# Altium PCB Rover_Science_Card_V1.PcbDoc
Units mm, origin at the board's own origin, x right, y up, seen from the top; angles counter-clockwise.
Board outline 99 x 101.8 mm, 2 copper layers (Top Layer, Bottom Layer); 10 components, 19 nets, 83 pads, 1 vias.
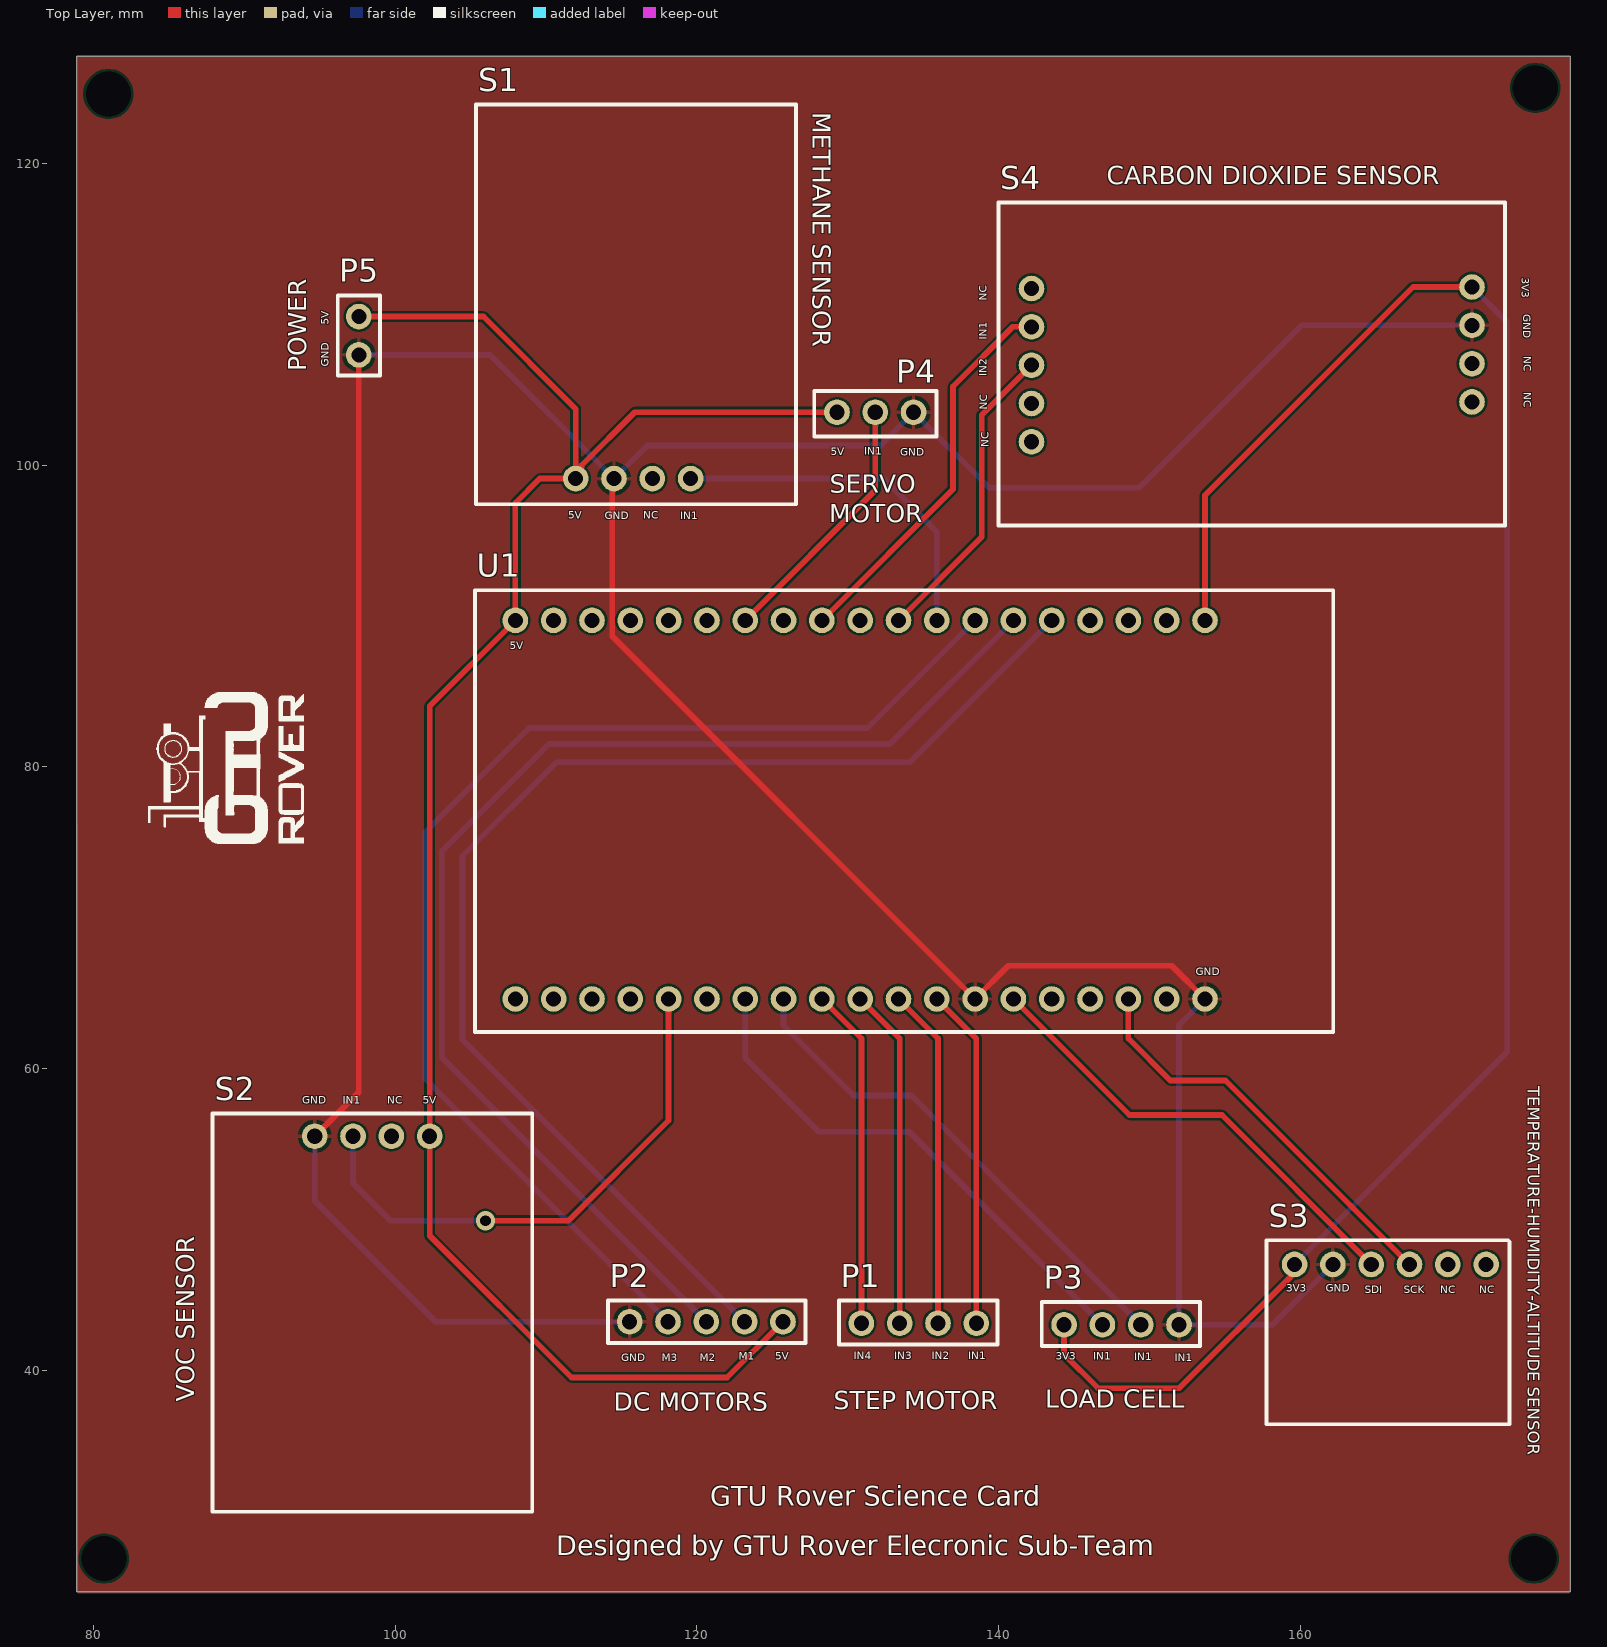
[diagram p0: Top Layer view]
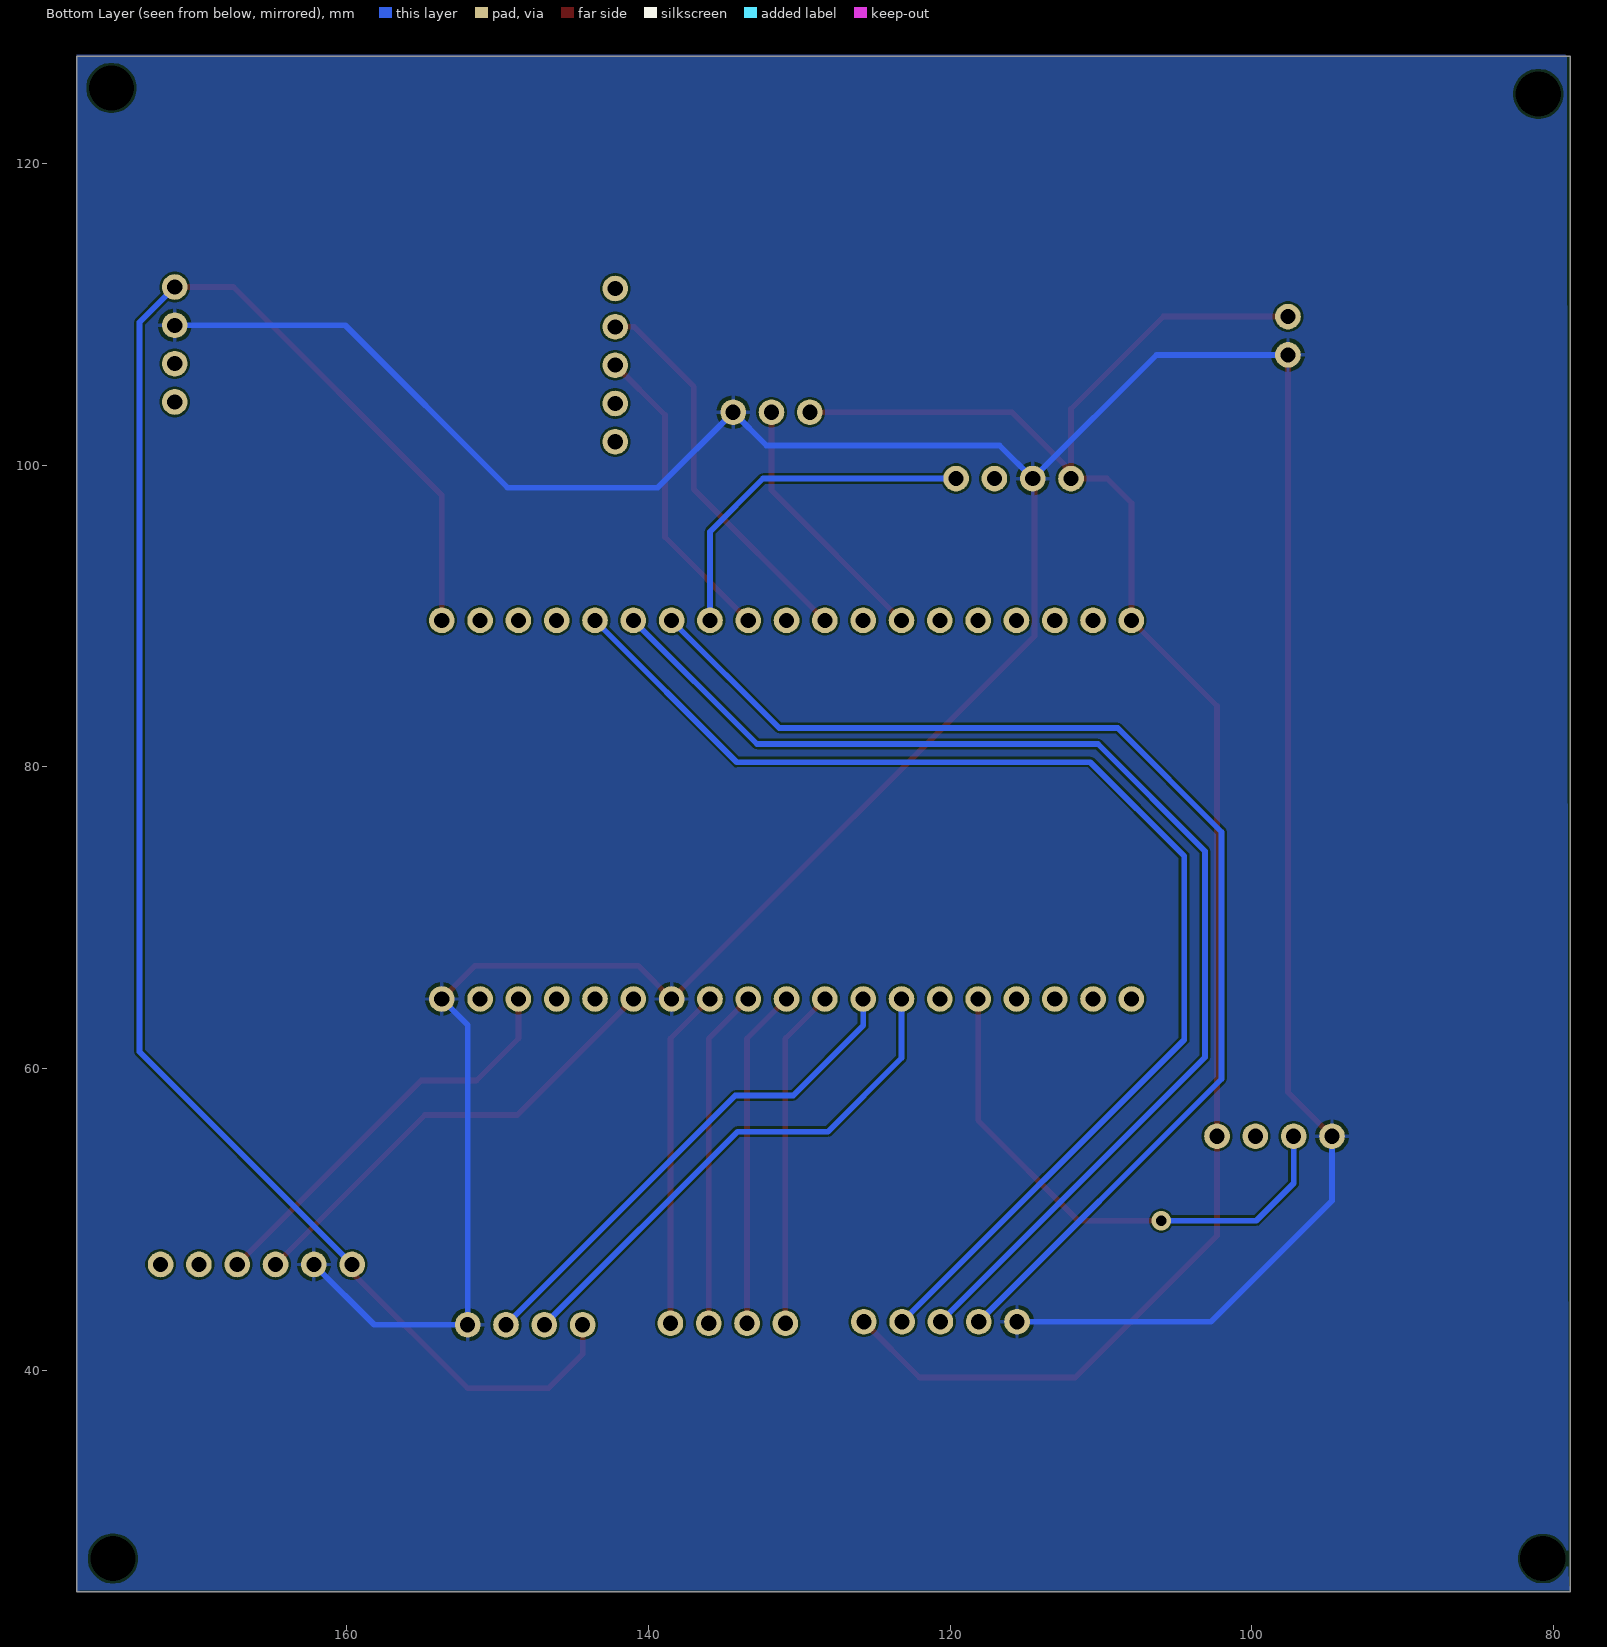
[diagram p1: Bottom Layer view, seen from below]

## Layer stack, top to bottom
Top Solder: solder mask 0.0102, Solder Resist, Dk 3.5
Top Layer: signal copper 0.0356
Dielectric 1: dielectric 0.32, FR-4, Dk 4.8
Bottom Layer: signal copper 0.0356
Bottom Solder: solder mask 0.0102, Solder Resist, Dk 3.5

## Board outline
78.9,25.3 78.9,127.1 177.9,127.1 177.9,25.3

## Design rules (kind name [scope] priority, off if disabled: settings)
Clearance [All] p1: gap=0.254 ignorepadtopadclearanceinfootprint=FALSE except(0: Arc-Hole Track-Hole SMDPad-Hole THPad-Hole Via-Hole Fill-Hole Poly-Hole Region-Hole Text-Hole; 0.152: Arc-Track Arc-SMDPad Arc-THPad Arc-Poly Track-Track Track-SMDPad Track-THPad Track-Poly SMDPad-SMDPad SMDPad-THPad SMDPad-Poly THPad-THPad THPad-Poly Via-Poly Fill-Poly Poly-Poly)
Height [All] p1: minheight=0 maxheight=50 prefheight=12.7
PolygonConnect [All] p1: connectstyle=Relief reliefconductorwidth=0.254 reliefentries=4 polygonreliefangle="90 Angle" airgapwidth=0.254
RoutingVias [All] p1: holewidth=0.711 width=1.27 viastyle="Through Hole" minholewidth=0.711 minwidth=1.27 maxholewidth=0.711 maxwidth=1.27
SolderMaskExpansion [All] p1: expansion=0.102 istentingtop=FALSE
Width [All] p1: maxlimit=1 minlimit=0.254 preferedwidth=0.3 minimp=50.000000 maximp=50.000000 favimp=50.000000
29 further rules are at their usual default settings.

## Components (designator, comment, footprint, x,y, rotation, side; value= is the part's Value field where it differs from the comment)
P1 "STEP_MOTOR_PIN" HX711 138.54,43.1 r270 top
P2 "MOTOR_PIN" Motor_PIN 120.72,43.2 r270 top
P3 "HX711" HX711 151.98,43 r270 top
P4 "SERVO_PIN" "Servo PIN" 131.9,103.5 r90 top
P5 "POWER_PIN" POWER 97.6,109.04 r0 top
S1 "MQ4" MQ4 115.58,111.4 r90 top
S2 "MQ135" MQ135 98.5,44.2 r270 top
S3 "BME280" BME280 164.68,47 r90 top
S4 "MHZ19" MHZ19 156.5,106.1 r0 top
U1 "ESP32-WROOM32-32U" ESP32-WROOM-32U 133.5,76.3 r270 top

## Footprints (in the part's own frame and the unit in brackets; to place one, negate y for a bottom-side part, rotate by r counter-clockwise, add the part's x,y. Pads: shape width x height; smd on the part's side, far side on the other; paste and mask are expansions set on the pad)
BME280 [mm] "Temperature-Humidity-Altidute"
  round 1.7 hole 1: 1(0,5.04) 2(0,2.5) 3(0,-0.04) 4(0,-2.58) 5(0,-5.12) 6(0,-7.66)
  silkscreen extent -10.6,-9.2 1.6,6.9, body extent -10.25,-8.9 1.25,6.44, height 6.3
ESP32-WROOM-32U [mm] "Microcontroller"
  round 1.7 hole 1: 1(-13.4,20.2) 2(-13.4,17.66) 3(-13.4,15.12) 4(-13.4,12.58) 5(-13.4,10.04) 6(-13.4,7.5) 7(-13.4,4.96) 8(-13.4,2.42) 9(-13.4,-0.12) 10(-13.4,-2.66) 11(-13.4,-5.2) 12(-13.4,-7.74) 13(-13.4,-10.28) 14(-13.4,-12.82) 15(-13.4,-15.36) 16(-13.4,-17.9) 17(-13.4,-20.44) 18(-13.4,-22.98) 19(-13.4,-25.52) 20(11.7,20.2) 21(11.7,17.66) 22(11.7,15.12) 23(11.7,12.58) 24(11.7,10.04) 25(11.7,7.5) 26(11.7,4.96) 27(11.7,2.42) 28(11.7,-0.12) 29(11.7,-2.66) 30(11.7,-5.2) 31(11.7,-7.74) 32(11.7,-10.28) 33(11.7,-12.82) 34(11.7,-15.36) 35(11.7,-17.9) 36(11.7,-20.44) 37(11.7,-22.98) 38(11.7,-25.52)
  silkscreen extent -15.4,-28.2 13.9,28.7, body extent -14.77,-27.5 13.17,27.6, height 6.69
HX711 [mm] "Load Cell Censor"
  round 1.7 hole 1: 1(0,0) 2(0,-2.54) 3(0,-5.08) 4(0,-7.62)
  silkscreen extent -1.5,-9.1 1.4,1.4, body extent -1.29,-8.88 1.2,1.28, height 8.54
MHZ19 [mm] "CO2 Sensor"
  round 1.7 hole 1: 1(14.9,5.7) 2(14.9,3.16) 3(14.9,0.62) 4(14.9,-1.92) 5(-14.3,5.6) 6(-14.3,3.06) 7(-14.3,0.52) 8(-14.3,-2.02) 9(-14.3,-4.56)
  silkscreen extent -16.5,-10.1 17.1,11.3, body extent -15.87,-9.2 16.7,10.55, height 9
Motor_PIN [mm]
  round 1.7 hole 1: 1(0,5) 2(0,2.46) 3(0,-0.08) 4(0,-2.62) 5(0,-5.16)
  silkscreen extent -1.4,-6.6 1.4,6.5, body extent -1.24,-6.43 1.24,6.27, height 8.54
MQ4 [mm] "CH4 Sensor"
  round 1.7 hole 1: 1(-12.3,3.6) 2(-12.3,1.06) 3(-12.3,-1.48) 4(-12.3,-4.02)
  silkscreen extent -14,-11 12.5,10.2, body extent -13.4,-10.3 12.1,9.7, height 33
MQ135 [mm]
  round 1.7 hole 1: 1(-11.3,3.8) 2(-11.3,1.26) 3(-11.3,-1.28) 4(-11.3,-3.82)
  silkscreen extent -12.8,-10.6 13.6,10.6, body extent -12.3,-10 13.2,10, height 33
POWER [mm] "5V-GND"
  round 1.7 hole 1: 1(0,0.8) 2(0,-1.74)
  silkscreen extent -1.4,-3.1 1.4,2.2, body extent -1.25,-3.01 1.24,2.07, height 8.54
"Servo PIN" [mm]
  round 1.7 hole 1: 1(0,2.6) 2(0,0.06) 3(0,-2.48)
  silkscreen extent -1.6,-4 1.4,4.1, body extent -1.3,-3.87 1.24,3.87, height 15.75

## Free pads (board coordinates)
  round 0 hole 3: 2(175.5,27.5) 3(80.7,27.5) 4(81,124.6) 5(175.6,125)

## Via types
v1: diameter 1.27, hole 0.711, Top Layer to Bottom Layer, 1 vias

## Nets (pads, with @x,y where several pads share a name; then routed paths per layer and width w, separated by ;. In a path a pad name is that pad's centre, name@x,y a point inside that pad or via, vN(x,y) a via of type N, cw(c..) or ccw(c..) an arc to the next point about the centre after c; other vN are vias at no path point)
3V3: P3.4 S3.1 S4.1 U1.1 | length 125.3
  Top Layer w0.381: P3.4 144.36,41.04 146.6,38.8 152,38.8 159.388,46.188 159.388,46.391 159.437,46.44 159.64,46.44 S3.1 ; U1.1 153.7,98 167.5,111.8 S4.1
  Bottom Layer w0.381: S3.1 173.74,61.1 173.74,109.46 S4.1
5V: P2.1 P4.1 P5.1 S1.1 S2.1 U1.19 | length 125
  Top Layer w0.381: P5.1 105.86,109.84 111.98,103.72 S1.1@111.98,99.58 ; P2.1 122.02,39.5 111.7,39.5 102.3,48.9 S2.1 102.3,84.02 U1.19 107.98,97.48 109.6,99.1 S1.1 S1.1@111.98,99.58 ; P4.1 115.9,103.5 112.364,99.964 112.364,99.841 112.103,99.58 S1.1@111.98,99.58
GND: P2.5 P3.1 P4.3 P5.2 S1.2 S2.4 S3.2 S4.2 U1.20 U1.26 | length 262.8
  Top Layer w0.381: S2.4 97.6,58.42 P5.2 ; S1.2 114.407,98.987 114.407,88.653 U1.26 140.66,66.8 151.5,66.8 U1.20
  Bottom Layer w0.381: S2.4 94.68,51.22 102.7,43.2 P2.5 ; P5.2 106.32,107.3 S1.2 116.72,101.3 132.18,101.3 P4.3 139.38,98.5 149.342,98.5 160.102,109.26 S4.2 ; U1.20 151.98,62.88 P3.1 158.18,43 S3.2
NetP1_1: P1.1 U1.27 | length 22.6
  Top Layer w0.381: U1.27 138.54,61.98 P1.1
NetP1_2: P1.2 U1.28 | length 22.6
  Top Layer w0.381: U1.28 136,61.98 P1.2
NetP1_3: P1.3 U1.29 | length 22.6
  Top Layer w0.381: U1.29 133.46,61.98 P1.3
NetP1_4: P1.4 U1.30 | length 22.6
  Top Layer w0.381: U1.30 130.92,61.98 P1.4
NetP2_2: P2.2 U1.5 | length 84.2
  Bottom Layer w0.381: P2.2 104.48,61.9 104.48,74.08 110.7,80.3 134.14,80.3 U1.5
NetP2_3: P2.3 U1.6 | length 82.7
  Bottom Layer w0.381: P2.3 103.1,60.74 103.1,74.4 110.2,81.5 132.8,81.5 U1.6
NetP2_4: P2.4 U1.7 | length 81.4
  Bottom Layer w0.381: P2.4 102,59.3 102,75.677 108.885,82.562 131.322,82.562 U1.7
NetP3_2: P3.2 U1.31 | length 33.7
  Bottom Layer w0.381: U1.31 125.76,62.84 130.4,58.2 134.24,58.2 P3.2
NetP3_3: P3.3 U1.32 | length 34.9
  Bottom Layer w0.381: U1.32 123.22,60.68 128.1,55.8 134.1,55.8 P3.3
NetP4_2: P4.2 U1.13 | length 17.4
  Top Layer w0.381: U1.13 131.84,98.32 P4.2
NetS1_4: S1.4 U1.8 | length 23.7
  Bottom Layer w0.381: S1.4 132.4,99.1 135.92,95.58 U1.8
NetS2_3: S2.3 U1.34 | length 35.9
  Top Layer w0.381: v1(106,49.9) 111.5,49.9 118.14,56.54 U1.34
  Bottom Layer w0.381: S2.3 97.22,52.38 99.7,49.9 v1(106,49.9)
NetS3_3: S3.3 U1.25 | length 31
  Top Layer w0.381: U1.25 148.7,56.9 154.82,56.9 S3.3
NetS3_4: S3.4 U1.22 | length 27.5
  Top Layer w0.381: U1.22 148.62,61.98 151.4,59.2 155.06,59.2 S3.4
NetS4_6: S4.6 U1.11 | length 25.9
  Top Layer w0.381: U1.11 137,98.4 137,105.2 140.96,109.16 S4.6
NetS4_7: S4.7 U1.9 | length 20.6
  Top Layer w0.381: U1.9 138.9,95.22 138.9,103.32 S4.7
pads on no net: S1.3 S2.2 S3.5 S3.6 S4.3 S4.4 S4.5 S4.8 S4.9 U1.2 U1.3 U1.4 U1.10 U1.12 U1.14 U1.15 U1.16 U1.17 U1.18 U1.21 U1.23 U1.24 U1.33 U1.35 U1.36 U1.37 U1.38

## Polygon pours and split planes (outlines as drawn)
GND on Top Layer "GND_L01_P000" (solid, pour order 0): 79,127.1 177.8,127.1 177.8,25.4 178,25.2 78.9,25.2
GND on Bottom Layer "GND_L02_P001" (solid, pour order 1): 79.1,127.1 79.2,127.2 177.9,127.2 177.9,25.2 177.7,25.4 78.9,25.4 78.9,25.6 79,25.7

## Silkscreen, mask and mechanical layers (free items; w line width, h text height)
Top Overlay:
  drawing of 7 lines, arcs and shapes, not listed
  text "METHANE SENSOR" at 127.7,123.4 h1.2 r270
  text "CARBON DIOXIDE SENSOR" at 147.2,118.6 h1.2
  text "3V3" at 174.7,112.4 h0.5 r270
  text "NC" at 139.223,110.893 h0.5 r90
  text "GND" at 174.8,110 h0.5 r270
  text "5V" at 95.623,109.293 h0.5 r90
  text "IN1" at 139.223,108.293 h0.5 r90
  text "NC" at 174.834,107.227 h0.5 r270
  text "GND" at 95.6,106.5 h0.5 r90
  text "POWER" at 94.1,106.2 h1.2 r90
  text "IN2" at 139.223,105.893 h0.5 r90
  text "NC" at 174.834,104.827 h0.5 r270
  text "NC" at 139.266,103.673 h0.5 r90
  text "NC" at 139.366,101.173 h0.5 r90
  text "IN1" at 131.093,100.677 h0.5
  text "5V" at 128.901,100.637 h0.5
  text "GND" at 133.5,100.6 h0.5
  text "SERVO" at 128.83,98.176 h1.2
  text "5V" at 111.501,96.437 h0.5
  text "NC" at 116.473,96.434 h0.5
  text "IN1" at 118.926,96.407 h0.5
  text "GND" at 113.9,96.4 h0.5
  text "MOTOR" at 128.8,96.2 h1.2
  text "5V" at 107.593,87.777 h0.5
  text "GND" at 153.093,66.177 h0.5
  text "TEMPERATURE-HUMIDITY-ALTITUDE SENSOR" at 175.1,58.8 h0.8 r270
  text "IN1" at 96.54,57.651 h0.5
  text "NC" at 99.485,57.669 h0.5
  text "5V" at 101.849,57.651 h0.5
  text "GND" at 93.843,57.638 h0.5
  text "3V3" at 159.093,45.177 h0.5
  text "GND" at 161.693,45.177 h0.5
  text "SDI" at 164.293,45.077 h0.5
  text "SCK" at 166.893,45.077 h0.5
  text "NC" at 169.293,45.077 h0.5
  text "NC" at 171.893,45.077 h0.5
  text "IN4" at 130.4,40.7 h0.5
  text "IN3" at 133.1,40.7 h0.5
  text "IN2" at 135.6,40.7 h0.5
  text "IN1" at 138,40.7 h0.5
  text "M1" at 122.793,40.677 h0.5
  text "5V" at 125.193,40.677 h0.5
  text "3V3" at 143.793,40.677 h0.5
  text "IN1" at 146.293,40.677 h0.5
  text "IN1" at 149.01,40.64 h0.5
  text "GND" at 114.993,40.577 h0.5
  text "M3" at 117.693,40.577 h0.5
  text "M2" at 120.193,40.577 h0.5
  text "IN1" at 151.693,40.577 h0.5
  text "VOC SENSOR" at 86.7,37.9 h1.2 r90
  text "LOAD CELL" at 143.1,37.5 h1.2
  text "STEP MOTOR" at 129.1,37.4 h1.2
  text "DC MOTORS" at 114.5,37.3 h1.2
  text "GTU Rover Science Card" at 120.9,31 h1.3
  text "Designed by GTU Rover Elecronic Sub-Team" at 110.7,27.733 h1.3